# Altium PCB EC3micro.PcbDoc
Units mm, origin at the board's own origin, x right, y up, seen from the top; angles counter-clockwise.
Board outline 60 x 16 mm, 2 copper layers (Top Layer, Bottom Layer); 29 components, 23 nets, 98 pads, 9 vias.
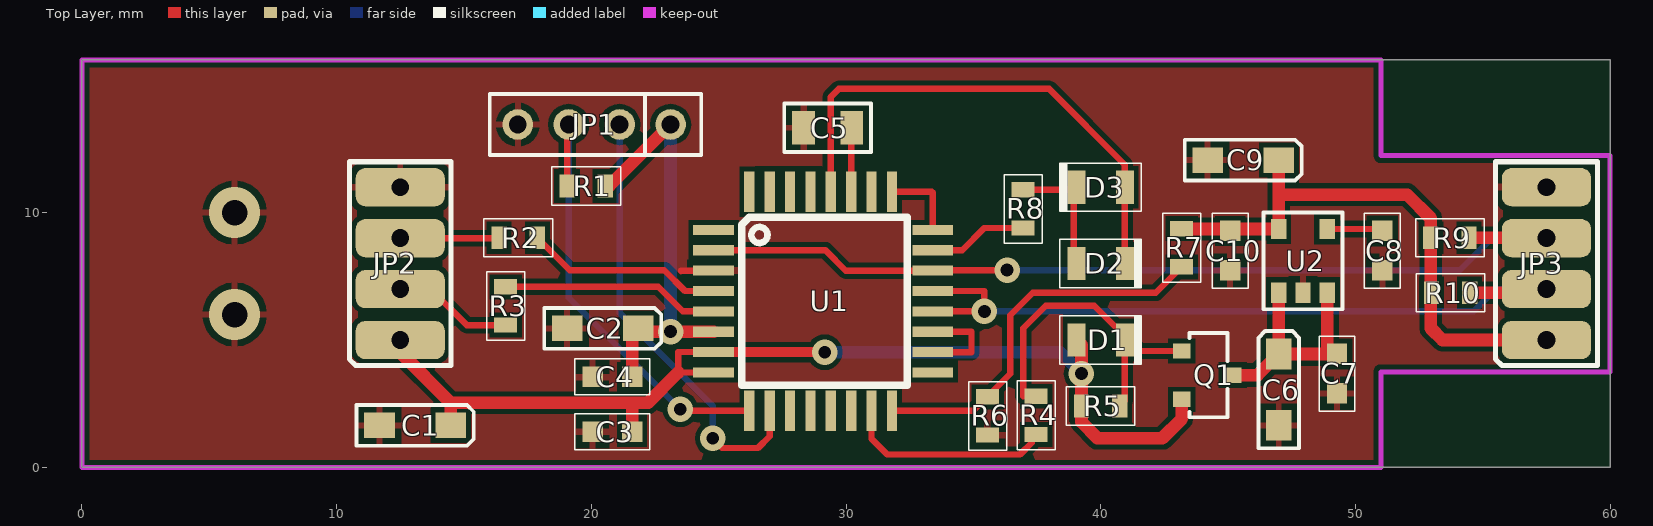
[diagram p0: Top Layer view]
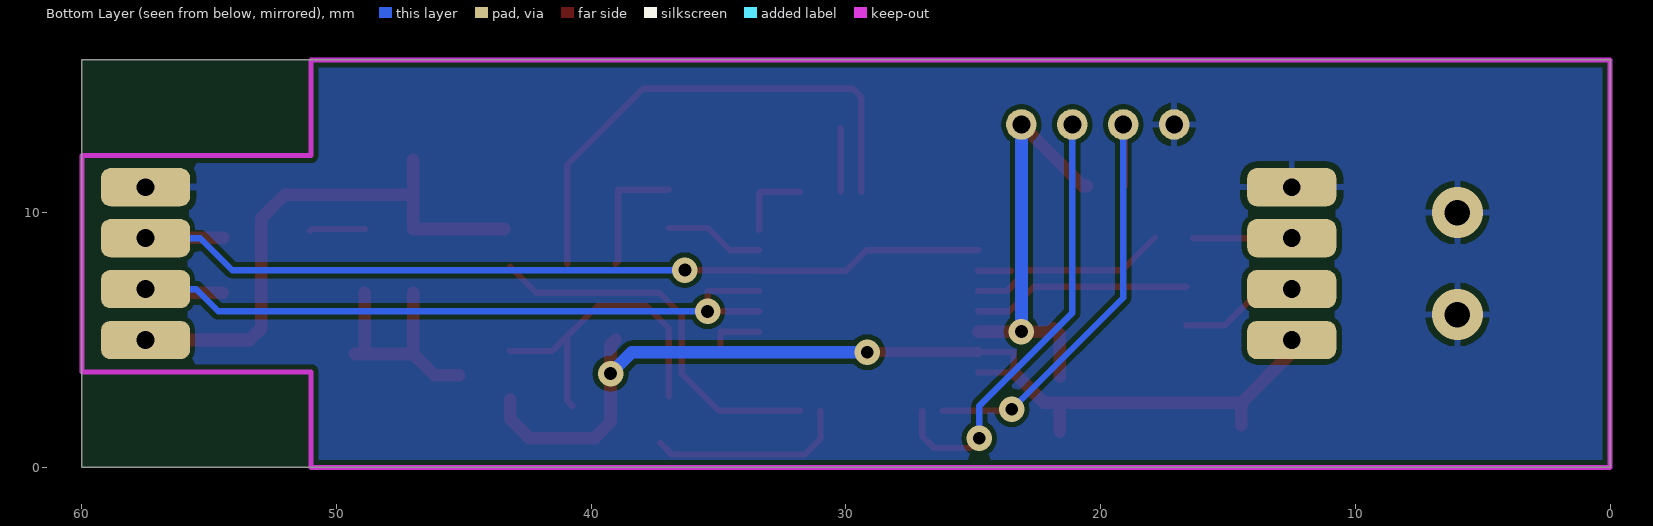
[diagram p1: Bottom Layer view, seen from below]

## Layer stack, top to bottom
Top Solder: solder mask 0.0102, Solder Resist, Dk 3.5
Top Layer: signal copper 0.0356
Dielectric1: dielectric 0.32, FR-4, Dk 4.8
Bottom Layer: signal copper 0.0356
Bottom Solder: solder mask 0.0102, Solder Resist, Dk 3.5

## Board outline
0,0 60,0 60,16 0,16

## Design rules (kind name [scope] priority, off if disabled: settings)
Clearance [All] p1: gap=0.2 ignorepadtopadclearanceinfootprint=FALSE except(0: Arc-Hole Track-Hole SMDPad-Hole THPad-Hole Via-Hole Fill-Hole Poly-Hole Region-Hole Text-Hole)
MinimumSolderMaskSliver [All] p1: minsoldermaskwidth=0
PolygonConnect [All] p1: connectstyle=Relief reliefconductorwidth=0.254 reliefentries=4 polygonreliefangle="90 Angle" airgapwidth=0.254
RoutingVias [All] p1: holewidth=0.4 width=0.9 viastyle="Through Hole" minholewidth=0.711 minwidth=1.27 maxholewidth=0.711 maxwidth=1.27
SilkToSilkClearance [All] p1: silktosilkclearance=0
SilkToSolderMaskClearance [IsPad] p1: minsilkscreentomaskgap=0 clearancetoexposedcopper=TRUE
SolderMaskExpansion [All] p1: expansion=0.102 istentingtop=FALSE
Width [All] p1: maxlimit=2 minlimit=0.2 preferedwidth=0.3
27 further rules are at their usual default settings.

## Components (designator, comment, footprint, x,y, rotation, side; value= is the part's Value field where it differs from the comment)
C1 "10u" TANTAL-A 11.684,1.651 r0 top
C2 "10u" TANTAL-A 19.05,5.461 r0 top
C3 "100n" C-0603 20.828,1.397 r180 top
C4 "100n" C-0603 20.828,3.556 r180 top
C5 "1uF" C-0805 30.226,13.335 r180 top
C6 "22u" TANTAL-A 46.99,1.651 r90 top
C7 "100n" C-0603 49.276,3.683 r270 top
C8 "nc" C-0603 51.054,8.509 r270 top
C9 "22u" TANTAL-A 44.196,12.065 r0 top
C10 "100n" C-0603 45.085,8.509 r270 top
D1 "LED" LED-0805 40,5 r180 top
D2 "LED" LED-0805 40,8 r180 top
D3 "LED" LED-0805 40,11 r0 top
JP1 "nc" IDS1-4P 23.114,13.462 r180 top
JP2 "nc" CONN4_long 12.5,8 r90 top locked
JP3 "nc" CONN4_long 57.5,8 r90 top
Q1 "IRLML6402" SOT-23 43.18,4.572 r270 top
R1 "4k7" R-0603 19.05,11.049 r0 top
R2 "0" R-0603 16.383,9.017 r0 top
R3 "0" R-0603 16.637,5.588 r90 top
R4 "470" R-0603 37.465,2.794 r270 top
R5 "10k" R-0603 39.243,2.413 r0 top
R6 "1k" R-0603 35.56,1.27 r90 top
R7 "1k5" R-0603 43.18,7.874 r90 top
R8 "470" R-0603 36.957,9.398 r90 top
R9 "nc" R-0603 52.959,9.017 r0 top
R10 "nc" R-0603 54.483,6.858 r180 top
U1 "C8051F320" QFP32 24.003,9.525 r270 top
U2 "LP2981-3.3" SOT-23-5 46.99,6.858 r180 top

## Footprints (in the part's own frame and the unit in brackets; to place one, negate y for a bottom-side part, rotate by r counter-clockwise, add the part's x,y. Pads: shape width x height; smd on the part's side, far side on the other; paste and mask are expansions set on the pad)
C-0603 [mm]
  rect 0.8x0.8 smd: 1(-0.775,0) 2(0.775,0)
  silkscreen extent -1.48,-0.7 1.48,0.7
C-0805 [mm]
  rect 0.9x1.3 smd: 1(0,0) 2(1.9,0)
  silkscreen extent -0.75,-0.95 2.65,0.95
CONN4_long [mm]
  rrect50% 1.5x3.5 hole 0.7: 1(-3,0) 2(-1,0) 3(1,0) 4(3,0)
  silkscreen extent -4,-2 4,2
IDS1-4P [mm]
  round 1.2 hole 0.7: 1(0,0) 2(2,0) 3(4,0) 4(6,0)
  silkscreen extent -1.2,-1.2 7.1,1.2
LED-0805 [mm]
  rect 0.7x1.3 smd: A(0.95,0) K(-0.95,0)
  silkscreen extent -1.6,-0.95 1.6,0.95
QFP32 [mm]
  rect 0.4x1.6 smd: 1(0.2,0.8) 2(1,0.8) 3(1.8,0.8) 4(2.6,0.8) 5(3.4,0.8) 6(4.2,0.8) 7(5,0.8) 8(5.8,0.8) 17(5.8,9.4) 18(5,9.4) 19(4.2,9.4) 20(3.4,9.4) 21(2.6,9.4) 22(1.8,9.4) 23(1,9.4) 24(0.2,9.4)
  rect 1.6x0.4 smd: 9(7.3,2.2) 10(7.3,3) 11(7.3,3.8) 12(7.3,4.6) 13(7.3,5.4) 14(7.3,6.2) 15(7.3,7) 16(7.3,7.8) 25(-1.3,7.8) 26(-1.3,7) 27(-1.3,6.2) 28(-1.3,5.4) 29(-1.3,4.6) 30(-1.3,3.8) 31(-1.3,3) 32(-1.3,2.2)
  silkscreen extent -0.3,1.9 6.3,8.4
R-0603 [mm]
  rect 0.6x0.9 smd: 1(0,0) 2(1.5,0)
  silkscreen extent -0.6,-0.75 2.1,0.75
SOT-23 [mm]
  rect 0.6x0.7 smd: 1(0,0) 2(0.95,2) 3(1.9,0)
  silkscreen extent -0.7,0.3 2.6,1.8
SOT-23-5 [mm]
  rect 0.6x0.8 smd: 1(0,0) 2(-0.95,0) 3(-1.9,0) 4(-1.9,-2.5) 5(0,-2.5)
  silkscreen extent -2.5,-3.15 0.6,0.65
TANTAL-A [mm]
  rect 1.2x1 smd: 1(0,0) 2(2.8,0)
  silkscreen extent -0.9,-0.8 3.7,0.8

## Part data
C1 C2 C6 C9: library part C-EL-TAN
C3 C4 C5 C7 C8 C10: library part C
JP1 JP2 JP3: library part "HEADER 4", "4 Pin Header 2,0 mm, 1x04"
R1 R2 R3 R4 R5 R6 R7 R8 R9 R10: library part RES

## Via types
v1: diameter 1, hole 0.5, Top Layer to Bottom Layer, 7 vias
v2: diameter 2, hole 1, Top Layer to Bottom Layer, 2 vias

## Nets (pads, with @x,y where several pads share a name; then routed paths per layer and width w, separated by ;. In a path a pad name is that pad's centre, name@x,y a point inside that pad or via, vN(x,y) a via of type N, cw(c..) or ccw(c..) an arc to the next point about the centre after c; other vN are vias at no path point)
+3V3: C2.2 C4.1 JP1.1 R1.2 U1.6 | length 16.7
  Top Layer w0.5: R1.2 20.701,11.049 JP1.1 ; C4.1 21.603,5.214 C2.2 21.986,5.325 U1.6
  Bottom Layer w0.5: v1(23.114,5.334) JP1.1
C2CK: JP3.3 R9.2 U1.2 U1.22 | length 36.6
  Top Layer w0.2: JP3.3@57.483,9.017 JP3.3
  Top Layer w0.25: U1.2 29.194,8.525 29.994,7.725 U1.22 33.425,7.747 v1(36.322,7.747)
  Top Layer w0.5: R9.2 JP3.3@57.483,9.017
  Bottom Layer w0.25: v1(36.322,7.747) 54.102,7.747 55.355,9 JP3.3
C2CK1: JP1.3 R1.1 U1.9 | length 18
  Top Layer w0.25: R1.1 JP1.3@19.05,13.398 ; v1@23.495,2.225 U1.9
  Bottom Layer w0.25: JP1.3 19.114,6.667 v1(23.495,2.286)
C2D: JP3.2 R10.1 U1.20 U1.21 | length 30.2
  Top Layer w0.25: U1.20 v1(35.433,6.125) 35.433,6.925 U1.21
  Top Layer w0.5: R10.1 JP3.2@57.358,6.858
  Bottom Layer w0.25: v1(35.433,6.125) 54.639,6.125 55.514,7 JP3.2
C2D1: JP1.2 U1.10 | length 17.4
  Top Layer w0.25: v1(24.765,1.143) 25.146,0.762 26.543,0.762 27.003,1.222 U1.10
  Bottom Layer w0.25: JP1.2 21.114,6.064 24.765,2.413 v1(24.765,1.143)
GND: C1.1 C2.1 C3.2 C4.2 C5.2 C6.1 C7.2 C8.2 C9.1 C10.2 JP1.4 JP2.4 JP3.4 R6.1 U1.3 U2.2 | length 1.3
  Top Layer w0.25: 23.522,7.725 U1.3
  other v2: 6,6 6,10
NetC5_1: C5.1 U1.27 | length 2.5
  Top Layer w0.2: C5.1@30.203,13.312 C5.1
  Top Layer w0.25: U1.27 C5.1@30.203,13.312
NetC6_2: C6.2 C7.1 Q1.2 U2.1 U2.3 | length 9.3
  Top Layer w0.5: Q1.2 46.161,3.622 C6.2 ; U2.1 C6.2 ; C7.1@48.89,4.451 U2.3 ; C7.1 49.269,4.451 C6.2
NetC8_1: C8.1 U2.4 | length 2.2
  Top Layer w0.25: U2.4 50.98,9.358 C8.1
NetD1_K: D1.K Q1.1 R4.1 R5.2 | length 12.7
  Top Layer w0.25: 36.957,2.794 36.957,5.461 37.846,6.35 39.751,6.35 41.529,4.572 Q1.1 ; R5.2 40.95,2.62 D1.K
NetD2_A: D2.A D3.K R8.2 | length 4.9
  Top Layer w0.25: R8.2 38.948,10.898 38.948,8.102 D2.A
NetD2_K: D2.K D3.A U1.28 | length 20.5
  Top Layer w0.25: U1.28 29.403,14.544 29.718,14.859 37.973,14.859 40.95,11.882 D3.A D2.K
NetJP2_2: JP2.2 R3.1 | length 4.7
  Top Layer w0.25: JP2.2 13.701,7 15.113,5.588 R3.1
NetJP2_3: JP2.3 R2.1 | length 3.9
  Top Layer w0.25: JP2.3 R2.1@16.366,9
NetR2_2: R2.2 U1.4 | length 7.8
  Top Layer w0.25: R2.2 19.153,7.747 22.86,7.747 23.682,6.925 U1.4
NetR3_2: R3.2 U1.5 | length 8.6
  Top Layer w0.25: R3.2 22.63,7.088 23.593,6.125 U1.5
NetR4_2: R4.2 U1.15 | length 7.8
  Top Layer w0.25: U1.15 31.003,1.128 31.623,0.508 36.83,0.508 37.286,0.964
NetR6_2: R6.2 R7.1 U1.16 | length 15.1
  Top Layer w0.25: U1.16 34.991,2.225 36.449,3.683 36.449,5.969 37.338,6.858 42.164,6.858 R7.1
NetR8_1: R8.1 U1.23 | length 3.9
  Top Layer w0.25: U1.23 34.56,8.525 35.433,9.398 R8.1
NetU1_18: U1.18 U1.19 | length 3.8
  Top Layer w0.25: U1.18 34.925,4.525 34.925,5.325 U1.19
NetU1_24: U1.24 U1.25 | length 3.1
  Top Layer w0.25: U1.25 33.371,10.825 33.403,10.793 U1.24
V_EXT: C9.2 C10.1 JP3.1 R7.2 R9.1 R10.2 U2.5 | length 21.7
  Top Layer w0.5: R7.2@43.418,9.358 U2.5 46.99,10.709 ; C9.2 46.99,12.059 46.99,10.709 ; JP3.1 53.42,5 52.959,5.461 R9.1 52.959,9.779 52.029,10.709 46.99,10.709
V_USB: C1.2 C3.1 D1.A JP2.1 Q1.3 R5.1 U1.7 U1.8 | length 41.7
  Top Layer w0.25: U1.7@24.798,4.53 23.41,4.53 23.41,3.725 U1.8
  Top Layer w0.4: U1.7 v1(29.163,4.525)
  Top Layer w0.5: JP2.1 12.5,4.518 14.478,2.54 ; C1.2 14.484,2.534 14.478,2.54 ; C3.1 21.603,2.527 ; 23.41,3.725 22.225,2.54 14.478,2.54 ; D1.A 39.243,4.807 R5.1 39.243,1.778 39.878,1.143 42.418,1.143 43.18,1.905 Q1.3
  Bottom Layer w0.5: v1(29.163,4.525) 38.401,4.525 v1(39.243,3.683)
pads on no net: U1.1 U1.11 U1.12 U1.13 U1.14 U1.17 U1.26 U1.29 U1.30 U1.31 U1.32

## Polygon pours and split planes (outlines as drawn)
GND on Top Layer "GND_T" (solid, remove dead copper, pour order 2): 0,0 60,0 60,16 0,16
GND on Bottom Layer "GND_B" (solid, remove dead copper, pour order 4): 0,0 60,0 60,16 0,16

## Keep-outs
Keep-Out Layer:
  lines w0.2: 0,0 51,0 51,3.75 60,3.75 60,12.25 51,12.25 51,16 0,16 0,0

## Dimensions
0,-0.25 to 60,0 on Mechanical 1
0,0 to 0,16 on Mechanical 1